# Altium PCB Adapter_UNIT_SPI_TO_HDMI.PcbDoc
Units mil, origin at the board's own origin, x right, y up, seen from the top; angles counter-clockwise.
Board outline 1700 x 840 mil, 4 copper layers (Top Layer, Layer 1, Layer 2, Bottom Layer), stack 29.356 mil thick; 4 components, 28 nets, 78 pads, 15 vias.
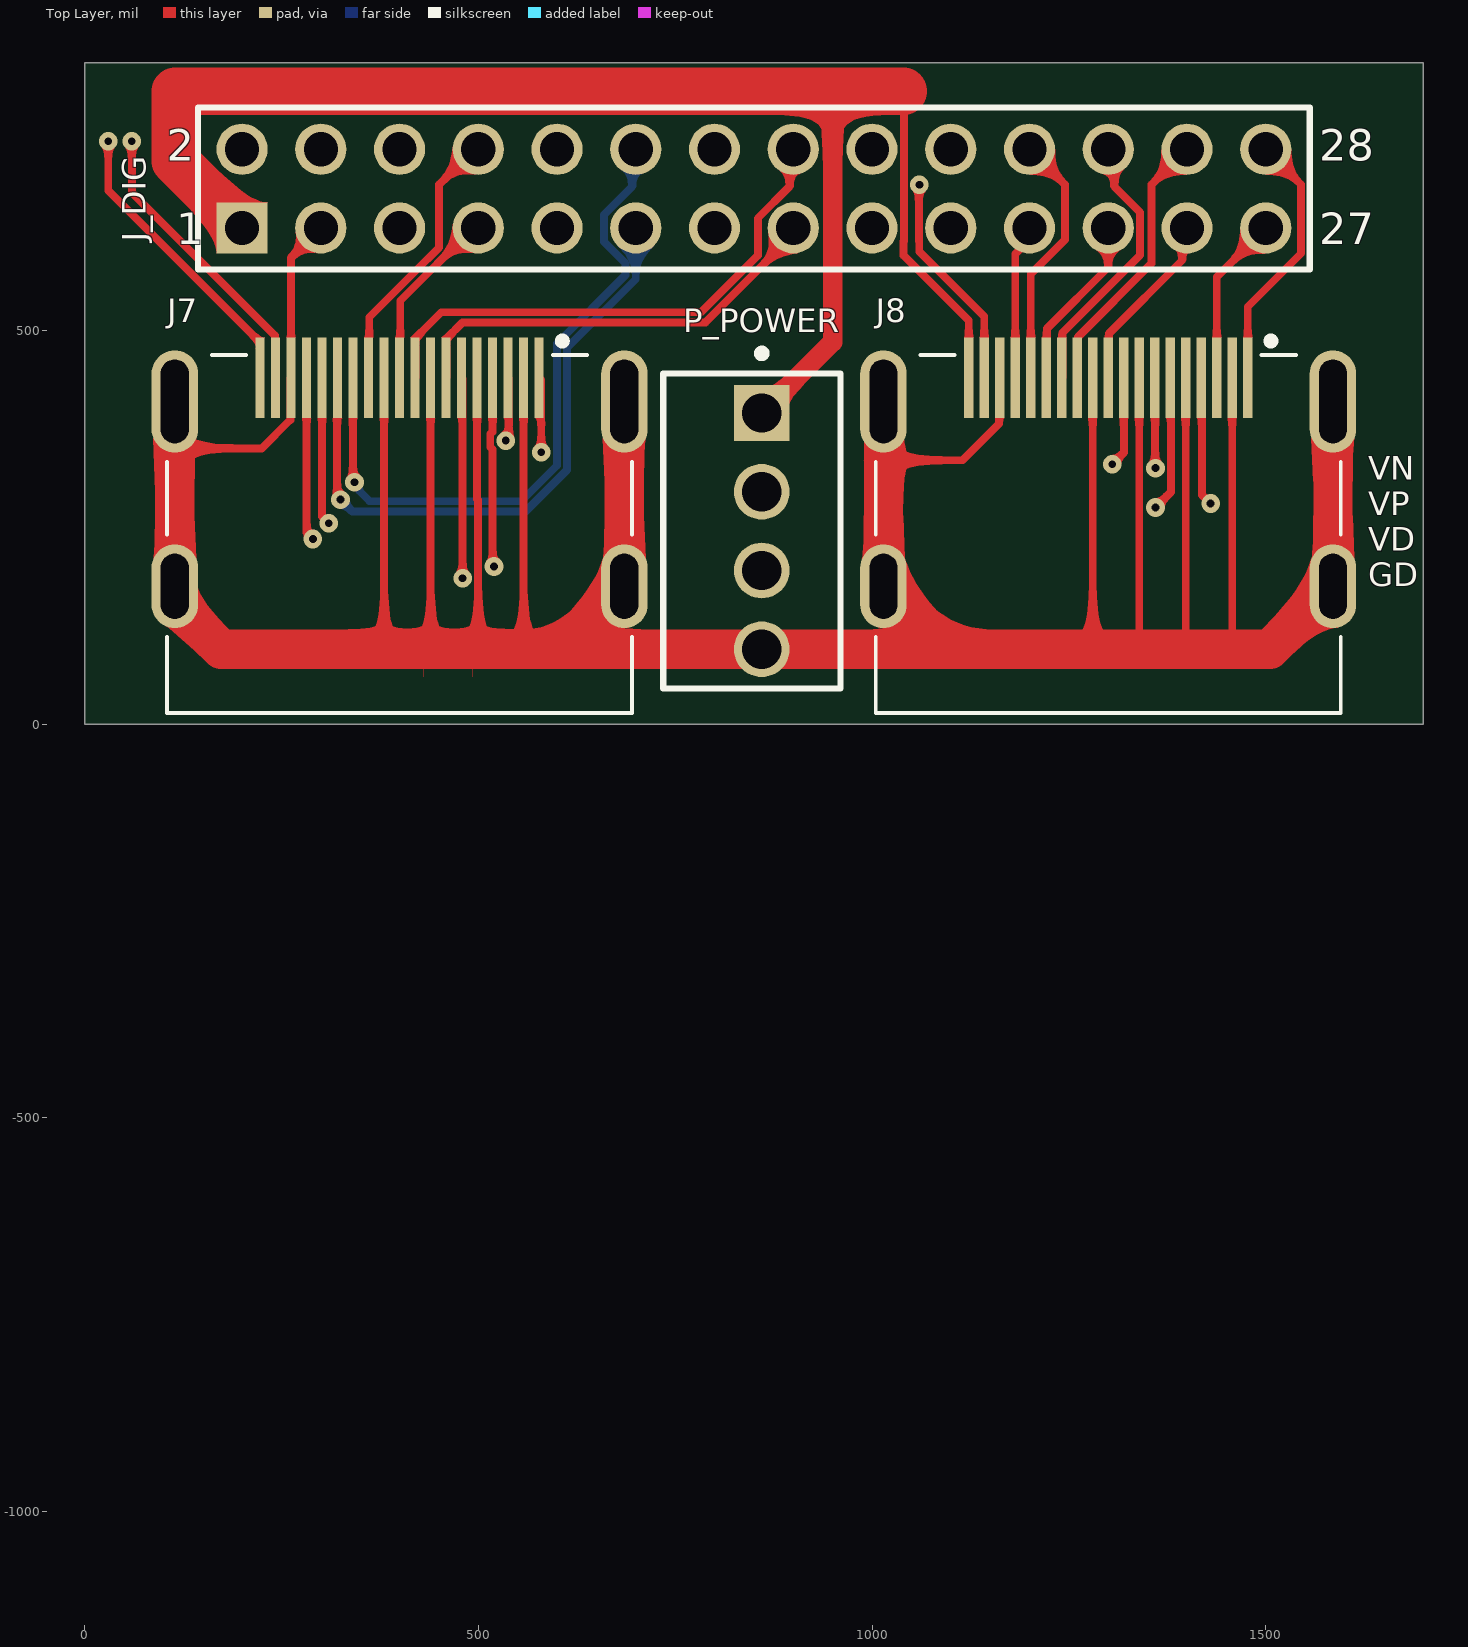
[diagram p0: Top Layer view]
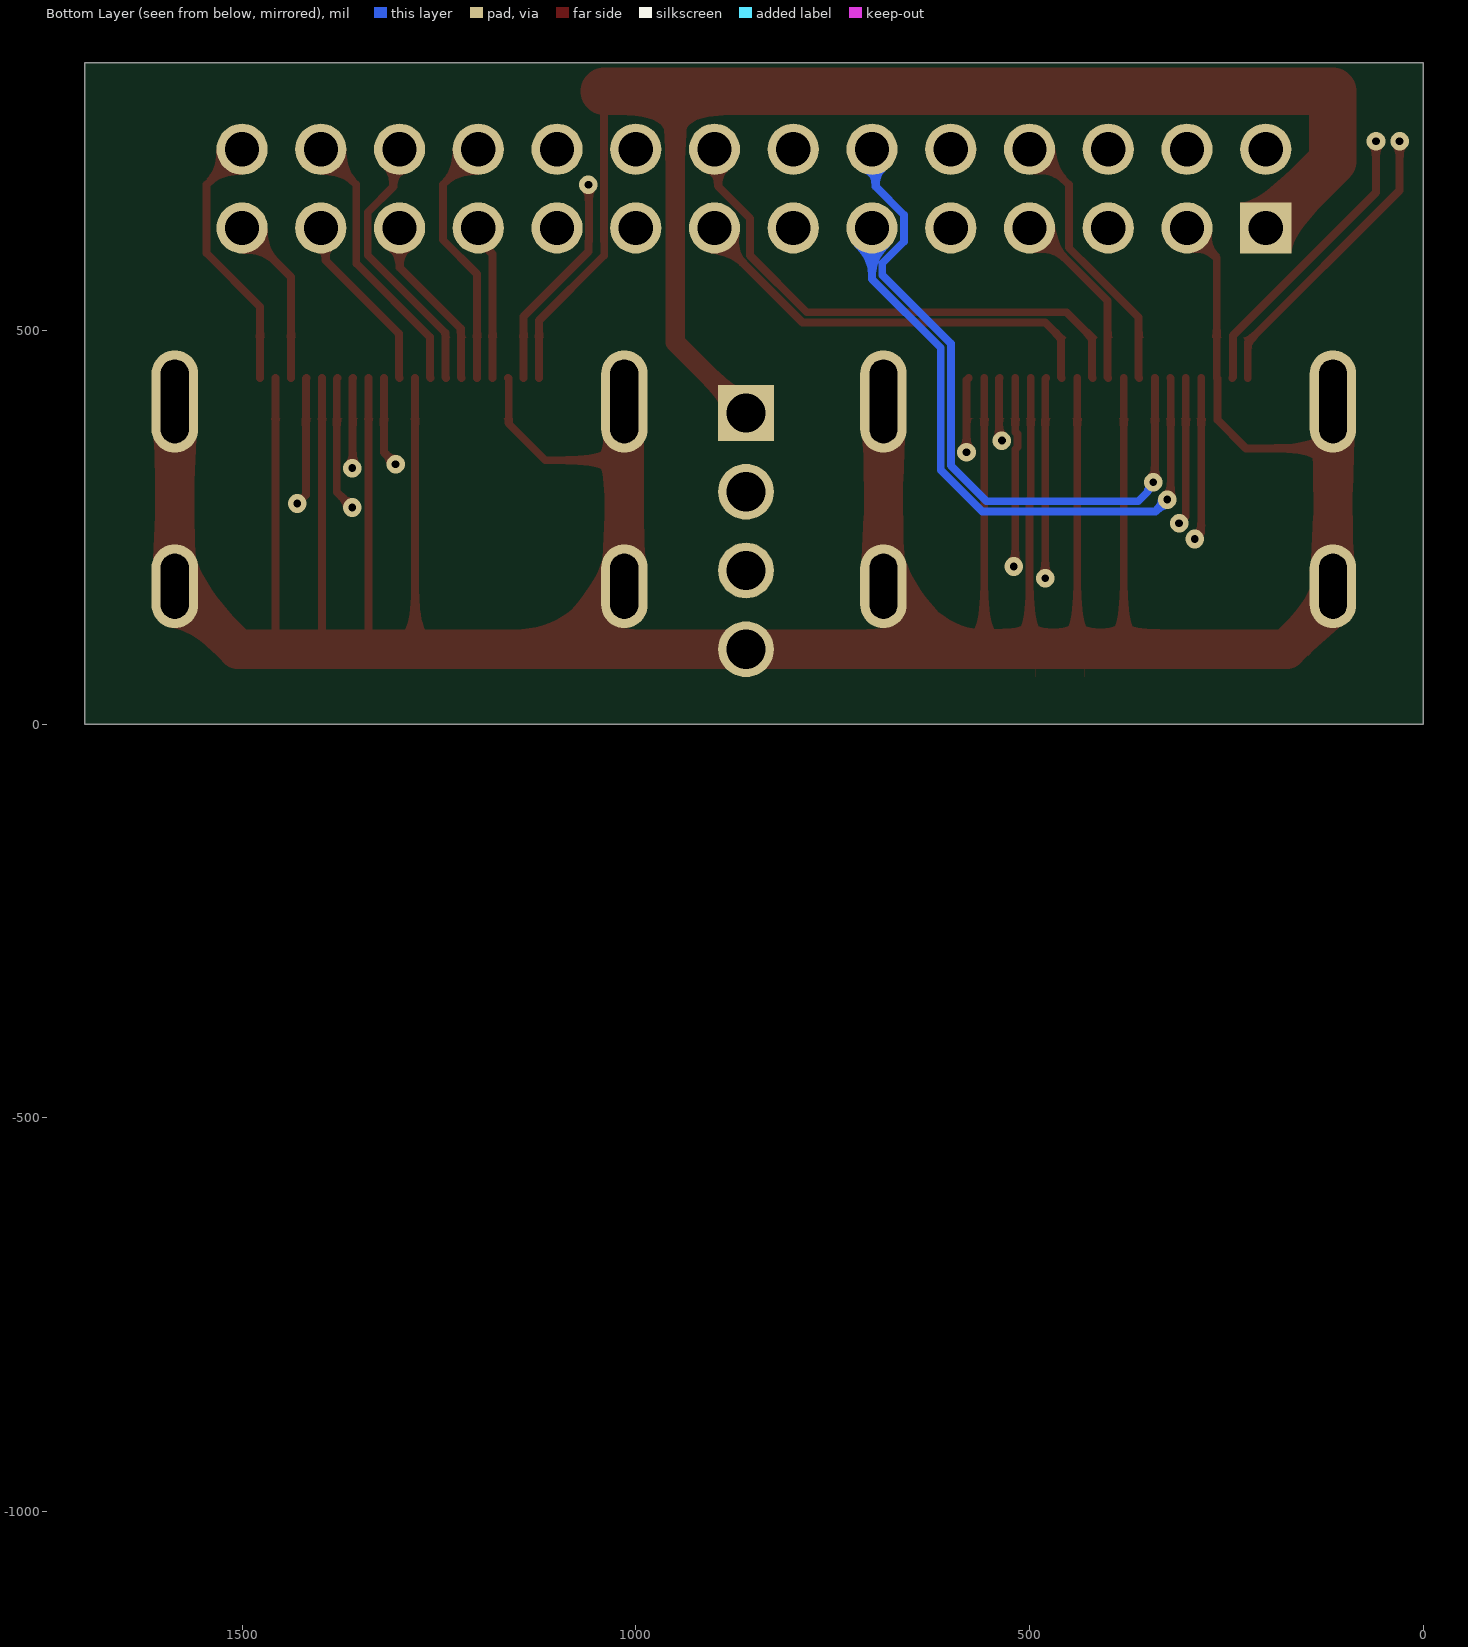
[diagram p1: Bottom Layer view, seen from below]
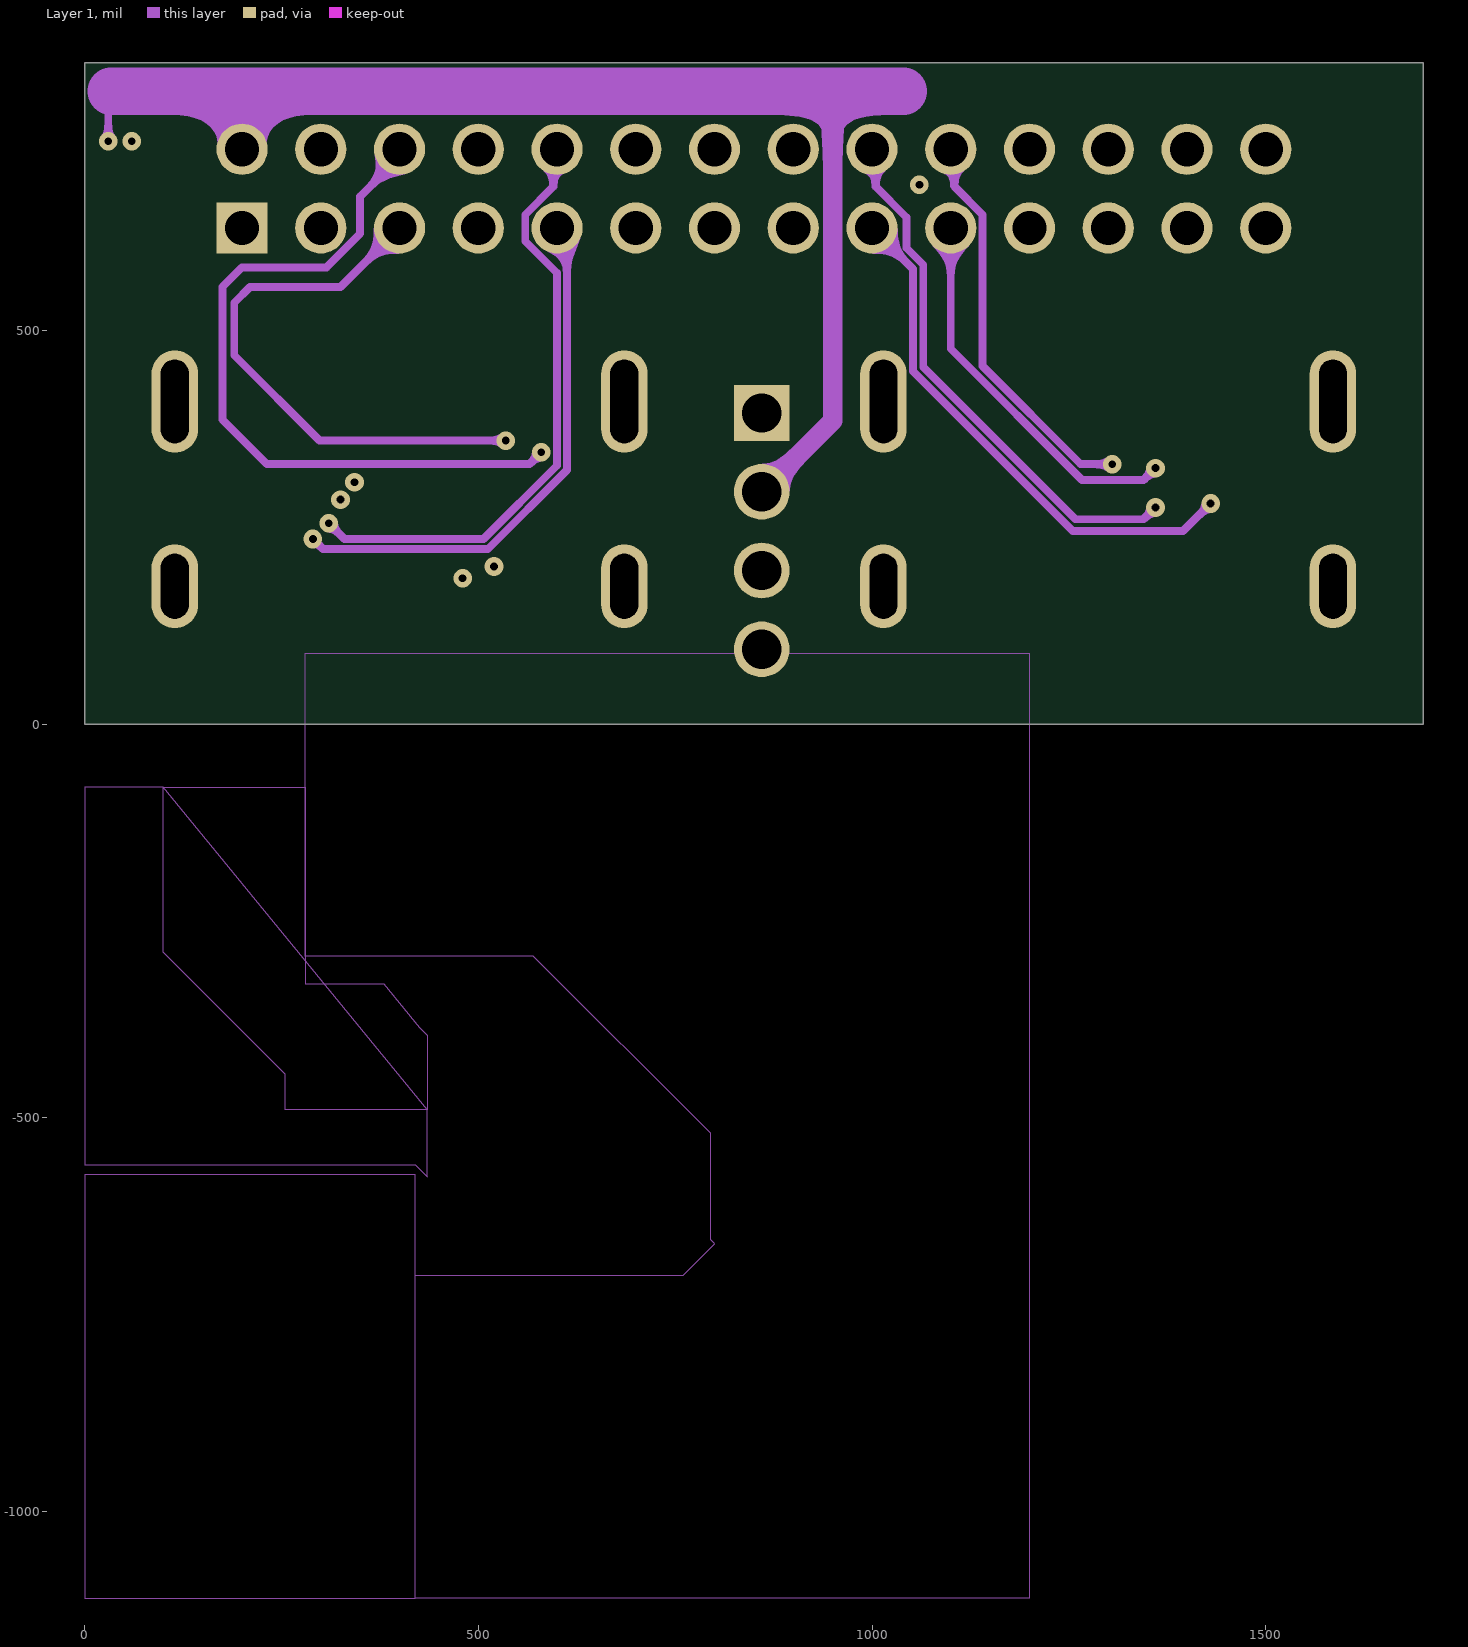
[diagram p2: Layer 1]
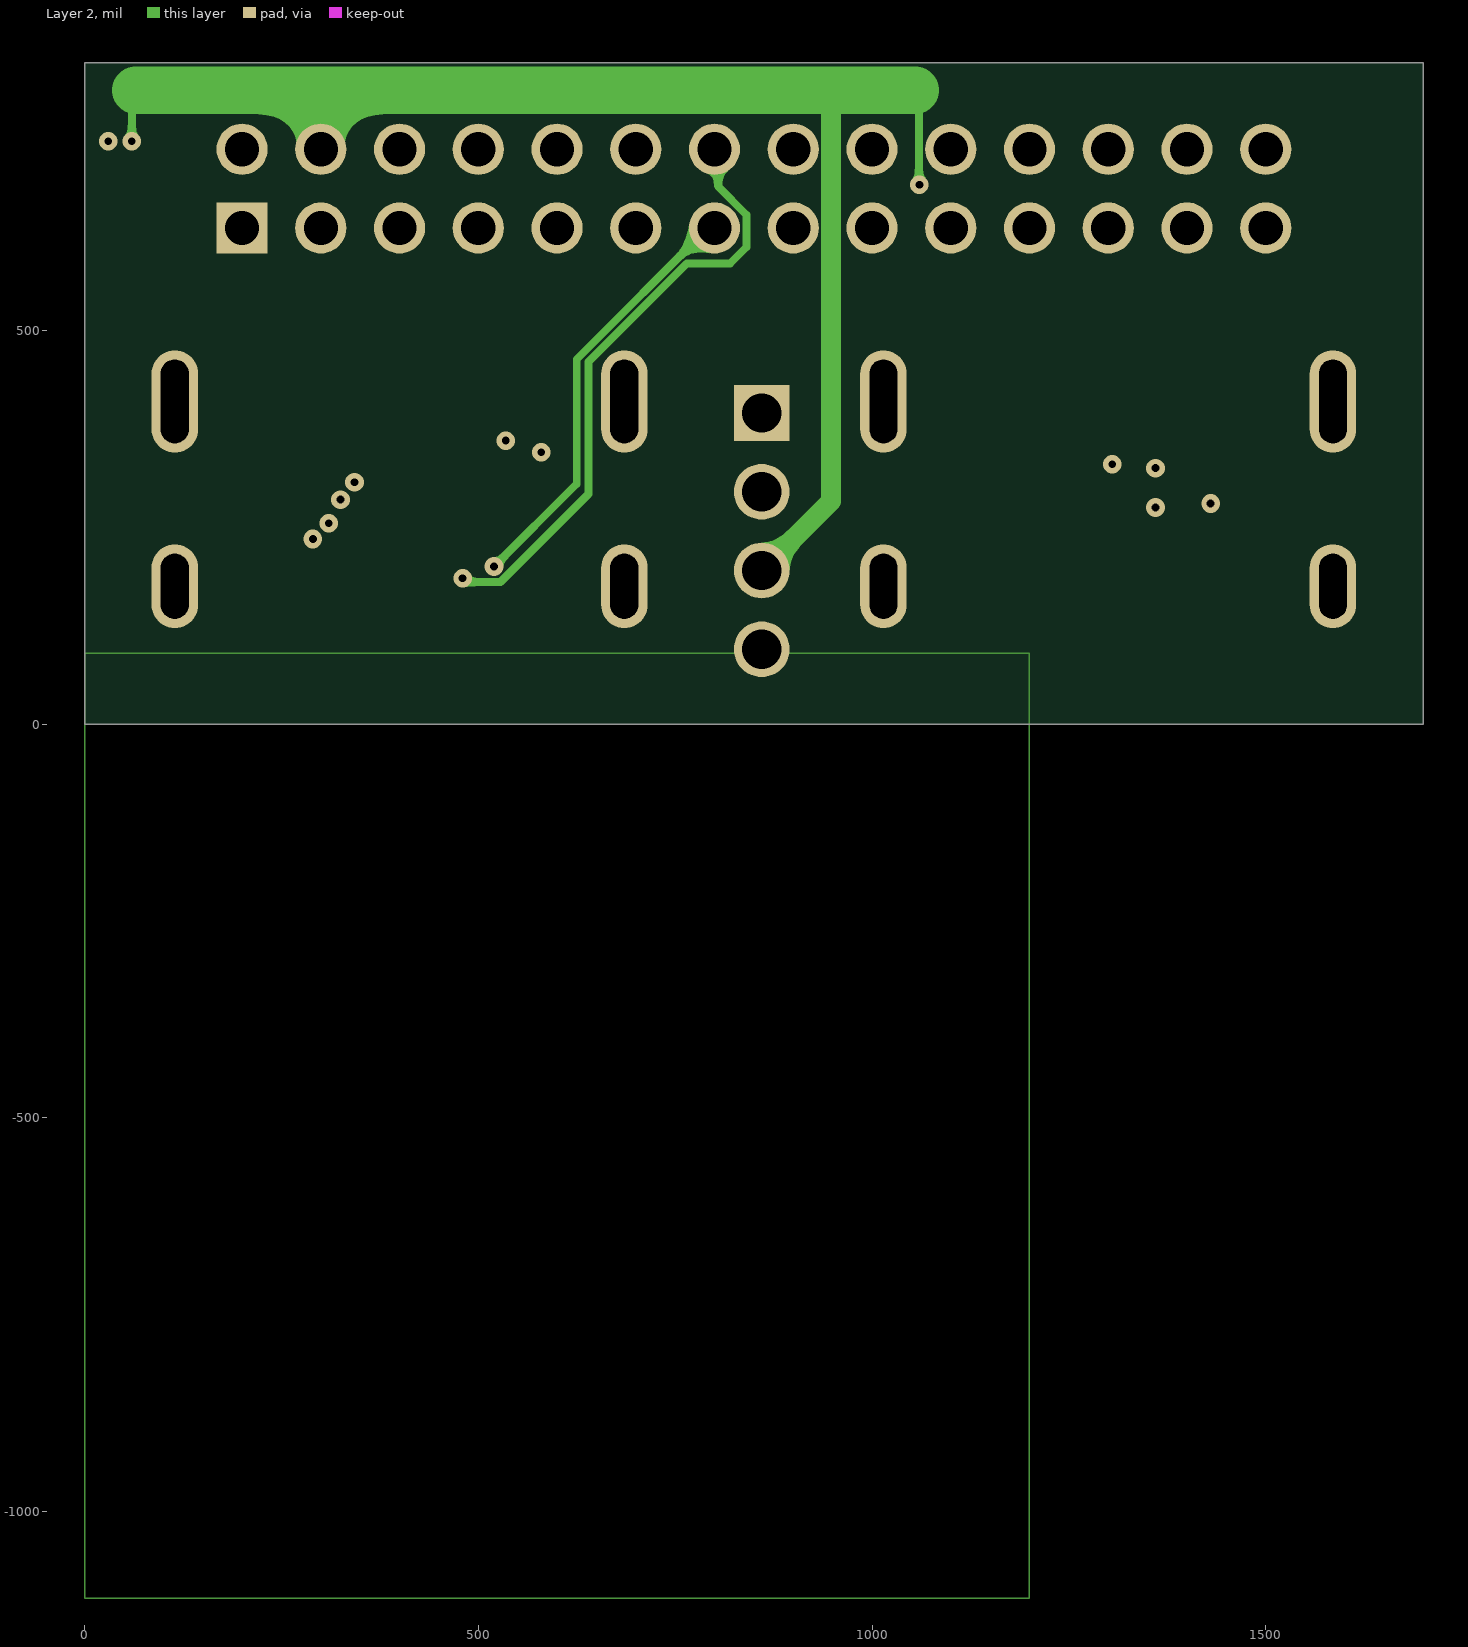
[diagram p3: Layer 2]

## Layer stack, top to bottom
Top Solder: solder mask 0.4, Solder Resist, Dk 3.5
Top Layer: signal copper 1.4
Dielectric 4: prepreg 2.8, PP-006, Dk 4.1
Layer 1: signal copper 1.378
Dielectric 2: prepreg 2.8, PP-006, Dk 4.1
Dielectric 1: dielectric 12.6, FR-4, Dk 4.8
Dielectric 3: prepreg 2.8, PP-006, Dk 4.1
Layer 2: signal copper 1.378
Dielectric 5: prepreg 2.8, PP-006, Dk 4.1
Bottom Layer: signal copper 1.4
Bottom Solder: solder mask 0.4, Solder Resist, Dk 3.5

## Board outline
0,0 1700,0 1700,840 0,840

## Design rules (kind name [scope] priority, off if disabled: settings)
BoardOutlineClearance [All] p1: gap=9.84 ignorepadtopadclearanceinfootprint=FALSE
Clearance [All] p1: gap=2.95 ignorepadtopadclearanceinfootprint=FALSE
ComponentClearance [All] p1: gap=3.94 collisioncheckmode=3 verticalgap=3.94 showdistances=FALSE
HoleSize [All] p1: absolutevalues=TRUE maxlimit=100 minlimit=3.94 maxpercent=80.000 minpercent=20.000
HoleToHoleClearance [All] p1: gap=10.83 allowstackedmicrovias=TRUE
MinimumAnnularRing [All] p1: minimumring=3.94
MinimumSolderMaskSliver [All] p1: minsoldermaskwidth=2.95
PlaneClearance [All] p1: clearance=2.95
PlaneConnect [All] p1: planeconnectstyle=Relief reliefexpansion=5.91 reliefentries=4 reliefconductorwidth=2.95 reliefairgap=2.95
PolygonConnect [All] p1: connectstyle=Relief reliefconductorwidth=2.95 reliefentries=4 polygonreliefangle="90 Angle" airgapwidth=2.95
RoomDefinition Adapter_UNIT_SPI_TO_HDMI [InComponentClass('Adapter_UNIT_SPI_TO_HDMI')] p1: confinementstyle=ConfineIn formatcopy=TRUE lockcomponents=FALSE outline 0,-1110 2000,-1110 2000,-110 0,-110
RoutingVias [All] p1: holewidth=9.84 width=23.62 viastyle="Through Hole" minholewidth=3.94 minwidth=7.87 maxholewidth=28 maxwidth=50
SilkToSilkClearance [All] p1: silktosilkclearance=5.91
SilkToSolderMaskClearance [IsPad] p1: minsilkscreentomaskgap=5.91 clearancetoexposedcopper=TRUE
SolderMaskExpansion [All] p1: expansion=2.95 istentingtop=FALSE
Width [All] p1: maxlimit=1968.5 minlimit=2.95 preferedwidth=5.91
22 further rules are at their usual default settings.

## Components (designator, comment, footprint, x,y, rotation, side; value= is the part's Value field where it differs from the comment)
J7 "1747981-2" TE_1747981-2_1747981-2(Primary) 400,409.65 r0 top locked
J8 "1747981-2" TE_1747981-2_1747981-2(Primary) 1300,409.65 r0 top locked
J_DIG "61302821121" 61302821121 850,680 r0 top locked
P_POWER "640456-4" TECO-640456-4 860,245 r90 top

## Footprints (in the part's own frame and the unit in brackets; to place one, negate y for a bottom-side part, rotate by r counter-clockwise, add the part's x,y. Pads: shape width x height; smd on the part's side, far side on the other; paste and mask are expansions set on the pad)
61302821121 [mm] "Pin Header, pitch 2.54 mm, THT, Vertical, dual row, 28p"
  rect 1.65x1.65 hole 1.1: 1(-16.51,-1.27)
  round 1.65 hole 1.1: 2(-16.51,1.27) 3(-13.97,-1.27) 4(-13.97,1.27) 5(-11.43,-1.27) 6(-11.43,1.27) 7(-8.89,-1.27) 8(-8.89,1.27) 9(-6.35,-1.27) 10(-6.35,1.27) 11(-3.81,-1.27) 12(-3.81,1.27) 13(-1.27,-1.27) 14(-1.27,1.27) 15(1.27,-1.27) 16(1.27,1.27) 17(3.81,-1.27) 18(3.81,1.27) 19(6.35,-1.27) 20(6.35,1.27) 21(8.89,-1.27) 22(8.89,1.27) 23(11.43,-1.27) 24(11.43,1.27) 25(13.97,-1.27) 26(13.97,1.27) 27(16.51,-1.27) 28(16.51,1.27)
  silkscreen extent -17.93,-2.62 17.93,2.62
TE_1747981-2_1747981-2(Primary) [mm]
  rect 0.3x2.6 smd: 1(4.5,0.76) 2(4,0.76) 3(3.5,0.76) 4(3,0.76) 5(2.5,0.76) 6(2,0.76) 7(1.5,0.76) 8(1,0.76) 9(0.5,0.76) 10(0,0.76) 11(-0.5,0.76) 12(-1,0.76) 13(-1.5,0.76) 14(-2,0.76) 15(-2.5,0.76) 16(-3,0.76) 17(-3.5,0.76) 18(-4,0.76) 19(-4.5,0.76)
  oval 1.5x3.3 hole 0.9 slot 2.7 at 90 deg: SH1(-7.25,0) SH2(7.25,0)
  oval 1.5x2.7 hole 0.9 slot 2.1 at 90 deg: SH3(-7.25,-5.96) SH4(7.25,-5.96)
  silkscreen extent -7.5,-10.05 7.5,2.07, body extent -7.5,-10 7.5,2, height 6.28
TECO-640456-4 [mm] "Through Hole, 4-Leads, Body 10.16x5.72mm, Pitch 2.54mm"
  rect 1.8x1.8 hole 1.27 paste+0: 1(3.81,0)
  round 1.8 hole 1.27 paste+0: 2(1.27,0) 3(-1.27,0) 4(-3.81,0)
  silkscreen extent -5.08,-2.54 5.86,3.18, body extent -5.08,-2.54 5.08,3.18, height 10.03

## Part data
J7 J8: "Conn HDMI RCP 19 POS 0.5mm Solder ST SMD 19 Terminal 1 Port T/R", Manufacturer="TE Connectivity", Package=None, Supplier Part Number 1=A130924CT-ND, Availability=Unavailable, ComponentLink1Description=Datasheet, ComponentLink1URL=https://www.te.com/commerce/DocumentDelivery/DDEController?Action=srchrtrv&DocNm=1747981&DocType=Customer+Drawing&DocLang=English, Detailed Description="HDMI Receptacle Connector 19 Position Panel Mount; Surface Mount, Right Angle; Through Hole", EU_RoHS_Compliance=Compliant, Manufacturer Part Number=1747981-2, MF="TE Connectivity", MP=1747981-2, price=None, Pricing1="1  6.31000  $6.31  10  6.04800  $60.48  25  5.54400  $138.60  50  5.29240  $264.62  100  5.04030  $504.03 (CAD)", SnapEDA_Link=https://www.snapeda.com/parts/1747981-2/TE%20Connectivity%20AMP%20Connectors/view-part/?ref=snap, Stock1=1,426, Supplier 1=Digikey, Supplier Link 1=https://www.digikey.ca/product-detail/en/te-connectivity-amp-connectors/1747981-2/A130924CT-ND/8602669, TE_purchase_URL=https://www.te.com/usa-en/product-1747981-2.html?te_bu=Cor&te_type=disp&te_campaign=seda_glo_cor-seda-global-disp-prtnr-fy19-seda-model-bom-cta_sma-317_1&elqCampaignId=32493
J_DIG: library part CMP-1502-01115-1, "THT Vertical Pin Header WR-PHD, Pitch 2.54 mm, Dual Row, 28 pins", Contact Resistance=20mOhm, Manufacturer="Wurth Elektronik", Operating Temperature=-40to105degC, Rated Current=3A, Withstanding Voltage=500VAC, Working Voltage=250VAC, Datasheet URL=https://katalog.we-online.de/em/datasheet/6130xx21121.pdf, Gender=Male, Manufacturer URL=http://www.we-online.de, Mounting Technology=THT, Orientation=Vertical, Package Reference=61302821121, Packaging=Bag, Part Number=61302821121, Pin Number=28, Pitch=2.54mm, Publisher=WurthElektronik, Row Number=Dual
P_POWER: library part CMP-2000-05419-1, "Male Header, Pitch 2.54 mm, 1 x 4 Position, Height 10.03 mm, Tail Length 3.56 mm, RoHS, Bulk", Color=White, Current, Rating="5 /  / A", Flammability Rating=UL94V-0, Manufacturer="TE Connectivity", Temperature, Operating="-55to+105 /  / degC", Voltage, Rating="250 /  / V", Agency Approvals=CSA,UL, Angle=Straight, Brand/Series=MTA-100Series, Color, Housing=White, Connector Type=MTA-100, Contact Centerline Spacing="0.100 /  / in.", Contact Mating Area Plating=Tin, Contact Plating=Tin, Contact Shape=Square, Contact Termination Area Plating=Tin, Datasheet URL=https://datasheet.ciiva.com/16286/eng-ds-82056-mta-0608-16286228.pdf, Datasheet Version=Dec-14, Length, Overall="0.4 /  / \"", Length, Pin="0.14 /  / \"", Length, Terminal Post="0.14 /  / in.", Manufacturer URL=http://www.te.com/, Material, Contact=CopperAlloy, Material, Housing=Polyester, Mount Angle=Vertical, Mounting Hole Size="0.04 /  / \"", Mounting Type=PCMount, Number Of Contacts=4, Number of Positions=4, Number Of Rows=1, Pin Spacing="0.1 /  / \"", Primary Type=InterconnectSystem, Size, Post="0.025 /  / in.", Special Features=Pinstrip, Standards=RoHSCompliant,ELVCompliant,UL94V-0, Termination=Solder, Type=PCBPlug

## Via types
v1: diameter 23.62, hole 9.84, Top Layer to Bottom Layer, 15 vias

## Nets (pads, with @x,y where several pads share a name; then routed paths per layer and width w, separated by ;. In a path a pad name is that pad's centre, name@x,y a point inside that pad or via, vN(x,y) a via of type N, cw(c..) or ccw(c..) an arc to the next point about the centre after c; other vN are vias at no path point)
GND: J7.2 J7.5 J7.8 J7.11 J7.17 J7.SH1 J7.SH2 J7.SH3 J7.SH4 J8.2 J8.5 J8.8 J8.11 J8.17 J8.SH1 J8.SH2 J8.SH3 J8.SH4 J_DIG.3 P_POWER.4 | length 6180.1
  Top Layer w10: J7.SH1@114.57,350 225,350 261.3,386.3 261.3,438.66 J7.17 262.21,592.21 J_DIG.3 ; 380.32,85.32 380.32,95 J7.11 ; 439.37,94.37 439.37,95 J7.8 ; J7.5 498.43,285.77 499.76,284.43 499.76,95 499.76,92.26 ; 557.48,87.48 557.48,95 J7.2 ; 1014.57,335 1115,335 1161.3,381.3 1161.3,438.66 J8.17 ; 1280.32,95 J8.11 ; J8.8 1339.37,95.63 1340,95 ; 1390,95 1398.43,103.43 J8.5 ; 1455,95 1457.48,97.48 J8.2
  Top Layer w50: J7.SH1 114.57,350 J7.SH3 114.57,153.83 173.4,95 380.32,95 439.37,95 499.76,95 557.48,95 605.43,95 ; J7.SH2 J7.SH4 685.43,153.83 681.25,149.65 660.08,149.65 605.43,95 ; J8.SH1 1014.57,335 J8.SH3 1014.57,153.83 1018.75,149.65 1039.92,149.65 1094.57,95 ; J8.SH2 J8.SH4 1585.43,153.83 1581.25,149.65 1560.08,149.65 1505.43,95 1455,95 1390,95 1340,95 1280.32,95 1094.57,95 ; 605.43,95 P_POWER.4 1094.57,95
M1_MISON: J7.15 J_DIG.10 | length 960
  Top Layer w10: J7.15 301.58,263.42 v1(310,255)
  Layer 1 w10: v1(310,255) 330,235 506.68,235 599.76,328.08 599.76,573.06 559.57,613.25 559.57,646.75 595.34,682.52 595.34,725.34 J_DIG.10
M1_MISOP: J7.16 J_DIG.9 | length 890.3
  Top Layer w10: J7.16 281.89,243.11 v1(290,235)
  Layer 1 w10: v1(290,235) 302.95,222.05 512.05,222.05 612.72,322.72 612.72,617.28 J_DIG.9
M1_MOSIN: J7.13 J_DIG.12 | length 888.2
  Top Layer w10: J7.13 340.67,439.29 340.67,309.33 v1(342.83,307.17)
  Bottom Layer w10: v1(342.83,307.17) 342.83,303.48 349.29,297.02 349.29,295.71 362.05,282.95 554.63,282.95 599.76,328.08 599.76,483.08 687.05,570.37 687.05,585 659.57,612.48 659.57,646.75 695.34,682.52 695.34,725.34 J_DIG.12
M1_MOSIP: J7.14 J_DIG.11 | length 815.8
  Top Layer w10: J7.14 320.63,438.94 320.63,289.37 v1(325,285)
  Bottom Layer w10: v1(325,285) 340,270 560,270 612.72,322.72 612.72,477.72 700,565 J_DIG.11
M2_MISON: J8.15 J_DIG.22 | length 327.1
  Top Layer w10: J_DIG.22 1245,685 1245,615 1201.57,571.57 J8.15
M2_MISOP: J8.16 J_DIG.21 | length 197.9
  Top Layer w10: J8.16 1181.89,597.02 1200,615.13 J_DIG.21
M2_MOSIN: J8.13 J_DIG.24 | length 348.4
  Top Layer w10: J8.13 1241.85,440.47 1241.85,496.85 1340.43,595.43 1340.43,649.85 1307.76,682.52 1307.76,722.24 J_DIG.24
M2_MOSIP: J8.14 J_DIG.23 | length 223
  Top Layer w10: J8.14 1222.17,440.47 1222.17,502.17 1300,580 J_DIG.23
M3_MISON: J8.6 J_DIG.18 | length 858.1
  Top Layer w10: v1(1360,275) 1379.76,294.76 1379.76,438.54 J8.6
  Layer 1 w10: J_DIG.18 1004.66,725.34 1004.66,682.52 1043.59,643.59 1043.59,604.73 1065,583.32 1065,453.32 1258.32,260 1345,260 v1(1360,275)
M3_MISOP: J8.4 J_DIG.17 | length 844.6
  Top Layer w10: J8.4 1419.02,438.66 1419.02,290.98 v1(1430,280)
  Layer 1 w10: J_DIG.17 1052.05,577.95 1052.05,447.95 1255,245 1395,245 v1(1430,280)
M3_MOSIN: J8.9 J_DIG.20 | length 624.1
  Top Layer w10: v1(1305,330) 1319.84,344.84 1319.84,439.41 J8.9
  Layer 1 w10: J_DIG.20 1104.66,725.34 1104.66,682.52 1140.43,646.75 1140.43,454.57 1265,330 v1(1305,330)
M3_MOSIP: J8.7 J_DIG.19 | length 603.5
  Top Layer w10: J8.7 1359.53,439.1 1359.53,325.47 v1(1360,325)
  Layer 1 w10: J_DIG.19 1100,476.68 1266.68,310 1345,310 v1(1360,325)
M4_MISON: J7.6 J_DIG.14 | length 1033.3
  Top Layer w10: J7.6 480,438.31 v1(480,185)
  Layer 2 w10: v1(480,185) 484.76,180.24 528.19,180.24 640,292.05 640,460 765,585 820,585 840.43,605.43 840.43,646.75 804.66,682.52 804.66,725.34 J_DIG.14
M4_MISOP: J7.4 J_DIG.13 | length 793.6
  Top Layer w10: J7.4 518.11,371.06 515.24,368.19 515.24,351.81 518.11,348.94 518.11,201.89 v1(520,200)
  Layer 2 w10: v1(520,200) 625,305 625,463.32 791.68,630 J_DIG.13
M4_MOSIN: J7.9 J_DIG.16 | length 682.7
  Top Layer w10: J7.9 420.59,440.47 420.59,490.59 452.95,522.95 782.95,522.95 855,595 855,642.18 895.34,682.52 895.34,725.34 J_DIG.16
M4_MOSIP: J7.7 J_DIG.15 | length 553.7
  Top Layer w10: J7.7 459.96,440.47 459.96,489.96 480,510 788.32,510 900,621.68 J_DIG.15
M14_CSN: J7.1 J_DIG.6 | length 1029.5
  Top Layer w10: J7.1 580,436.73 v1(580,345)
  Layer 1 w10: J_DIG.6 400,720 350,670 350,622.82 307.18,580 200,580 175,555 175,386.68 231.45,330.24 565.24,330.24 v1(580,345)
M14_CSP: J7.3 J_DIG.5 | length 787.4
  Top Layer w10: v1(535,360) 535,363.69 538.7,367.39 538.7,438.66 J7.3
  Layer 1 w10: J_DIG.5 325,555 210,555 190,535 190,468.32 298.32,360 v1(535,360)
M14_SCLKN: J7.12 J_DIG.8 | length 351.1
  Top Layer w10: J7.12 361.53,440.47 361.53,516.53 420,575 450,605 450,685 495,730 J_DIG.8
M14_SCLKP: J7.10 J_DIG.7 | length 235.8
  Top Layer w10: J7.10 400.9,440.47 400.9,537.59 493.32,630 J_DIG.7
M23_CSN: J8.1 J_DIG.28 | length 337.2
  Top Layer w10: J8.1 1477.17,530 1545,597.83 1545,685 J_DIG.28
M23_CSP: J8.3 J_DIG.27 | length 216.2
  Top Layer w10: J8.3 1437.8,567.8 J_DIG.27
M23_SCLKN: J8.12 J_DIG.26 | length 348.2
  Top Layer w10: J8.12 1261.54,440.47 1261.54,491.54 1355,585 1355,685 J_DIG.26
M23_SCLKP: J8.10 J_DIG.25 | length 231.9
  Top Layer w10: J8.10 1300.91,440.47 1300.91,495.91 1393.93,588.93 1393.93,623.93 J_DIG.25
VDD: J7.18 J8.18 J_DIG.4 P_POWER.3 | length 2559.8
  Top Layer w10: v1(60,740) 60,675 241.61,493.39 241.61,440.47 J7.18 ; v1(1060.2,685) 1059.57,684.37 1059.57,613.25 1060,612.82 1060,600 1142.52,517.48 J8.18
  Layer 2 w10: v1(60,740) 60,800 65,805 ; 1055,805 1059.76,800.24 1059.76,746.94 1059.57,746.75 1059.57,685.63 v1(1060.2,685)
  Layer 2 w25: P_POWER.3 947.93,282.93 947.93,797.93 955,805
  Layer 2 w60: 65,805 300,805 ; J_DIG.4 300,805 ; 1055,805 955,805 300,805
VSTIMN: J8.19 J_DIG.1 P_POWER.1 | length 1977.9
  Top Layer w10: 1040,803.45 1040.43,803.02 1040.43,613.25 1040,612.82 1040,595.19 1122.83,512.35 J8.19
  Top Layer w25: P_POWER.1 950,485 950,803.45
  Top Layer w60: J_DIG.1 115,715 115,803.45 950,803.45 1040,803.45
VSTIMP: J7.19 J_DIG.2 P_POWER.2 | length 2070.9
  Top Layer w10: v1(30,740) 30,677.68 222.84,484.84 J7.19
  Layer 1 w10: v1(30,740) 30,800 33.45,803.45
  Layer 1 w25: P_POWER.2 950,385 950,803.45
  Layer 1 w60: 33.45,803.45 200,803.45 ; J_DIG.2 200,803.45 ; 1040,803.45 950,803.45 200,803.45

## Polygon pours and split planes (outlines as drawn)
GND on Layer 2 "NONET_L03_P001" (solid, shelved, pour order 1): 0,90 1200,90 1200,-1110 0,-1110
GND on Layer 2 "NONET_L03_P000" (solid, shelved, pour order 0): 0,90 0,-1110 1200,-1110 1200,-1080 1200,90
no net on Layer 1 "NONET_L02_P006" (solid, shelved, pour order 6): 100,-80 0,-80 0,-560 420,-560 435,-575 435,-490
no net on Layer 1 "NONET_L02_P005" (solid, shelved, pour order 5): 280,-80 280,-330 380,-330 425,-385 435,-395 435,-490 255,-490 255,-445 100,-290 100,-80
no net on Layer 1 "NONET_L02_P004" (solid, shelved, pour order 4): 420,-700 760,-700 800,-660 795,-655 795,-520 570,-295 280,-295 280,90 1200,90 1200,-1110 420,-1110
no net on Layer 1 "NONET_L02_P003" (solid, shelved, pour order 3): 0,-572.71 0,-1110 420,-1110 420,-572.71

## Silkscreen, mask and mechanical layers (free items; w line width, h text height)
Top Overlay:
  text "VN / VP / VD / GD" at 1630,175 h30
Top Assembly:
  lines w7.8: 0,0 0,840 1700,840 1700,0

## Text inside footprints (layer, text, board x,y; h text height)
J_DIG: Top Overlay "27" at 1568.11,609.13 h40; Top Overlay "28" at 1568.11,715.43 h40; Top Overlay "1" at 116.14,609.13 h40; Top Overlay "2" at 104.33,715.43 h40